# Altium PCB Clock.PcbDoc
Units mm, origin at the board's own origin, x right, y up, seen from the top; angles counter-clockwise.
Board outline 90 x 30 mm, 2 copper layers (Top Layer, Bottom Layer); 17 components, 76 nets, 181 pads, 111 vias.
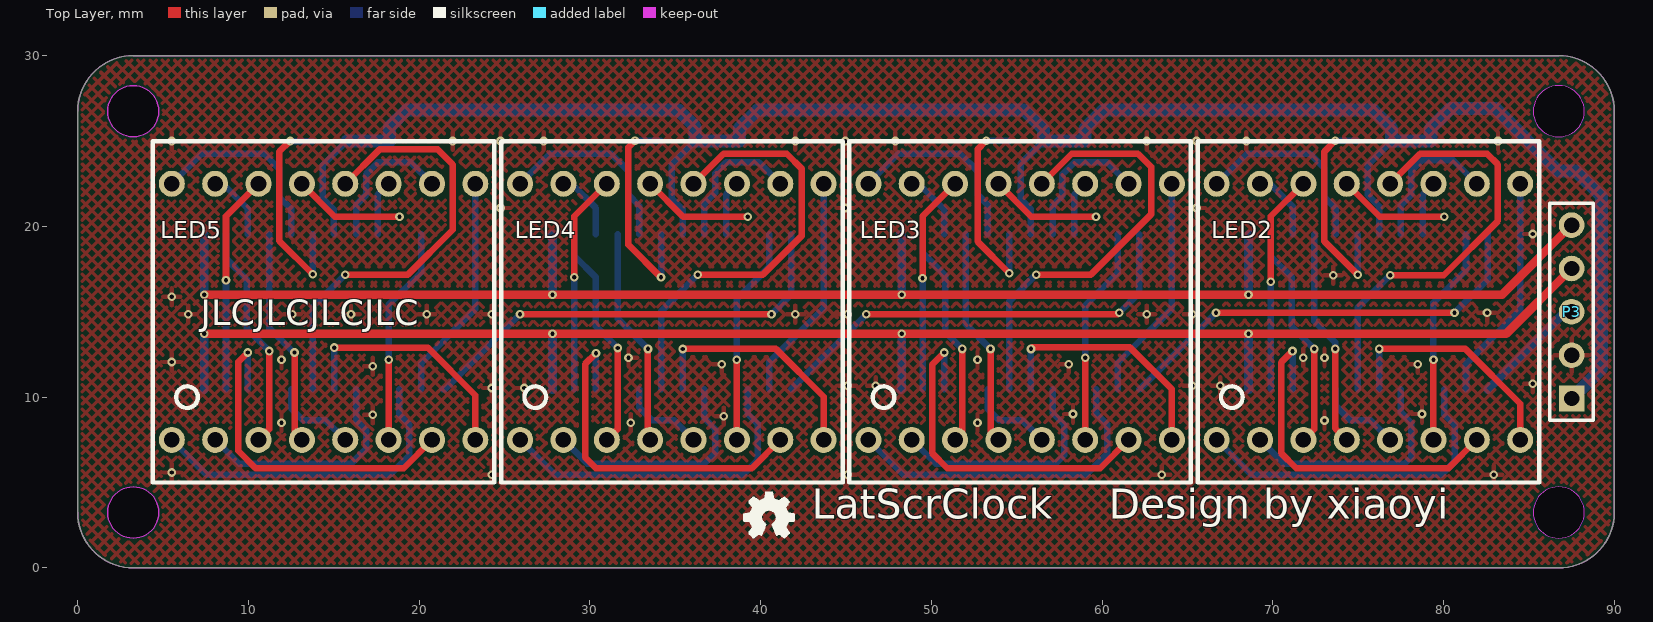
[diagram p0: Top Layer view]
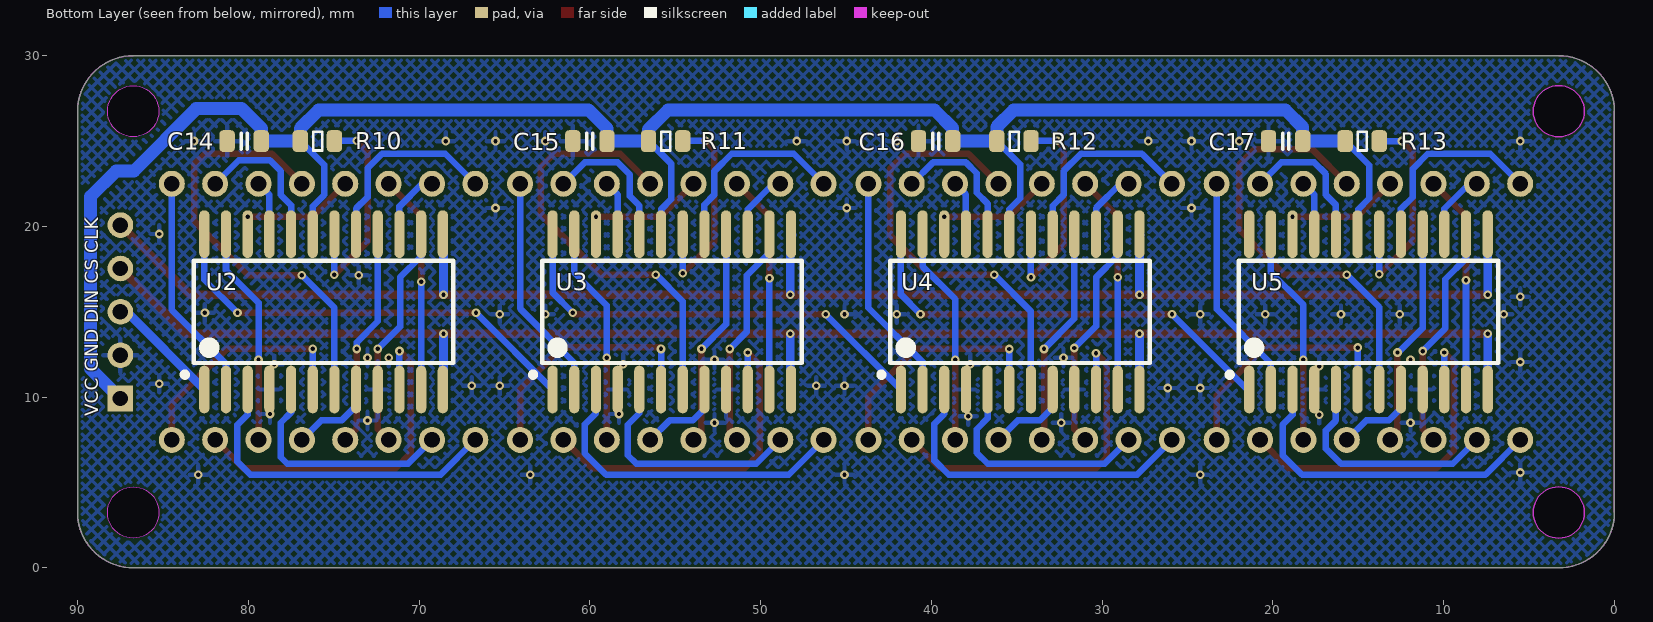
[diagram p1: Bottom Layer view, seen from below]
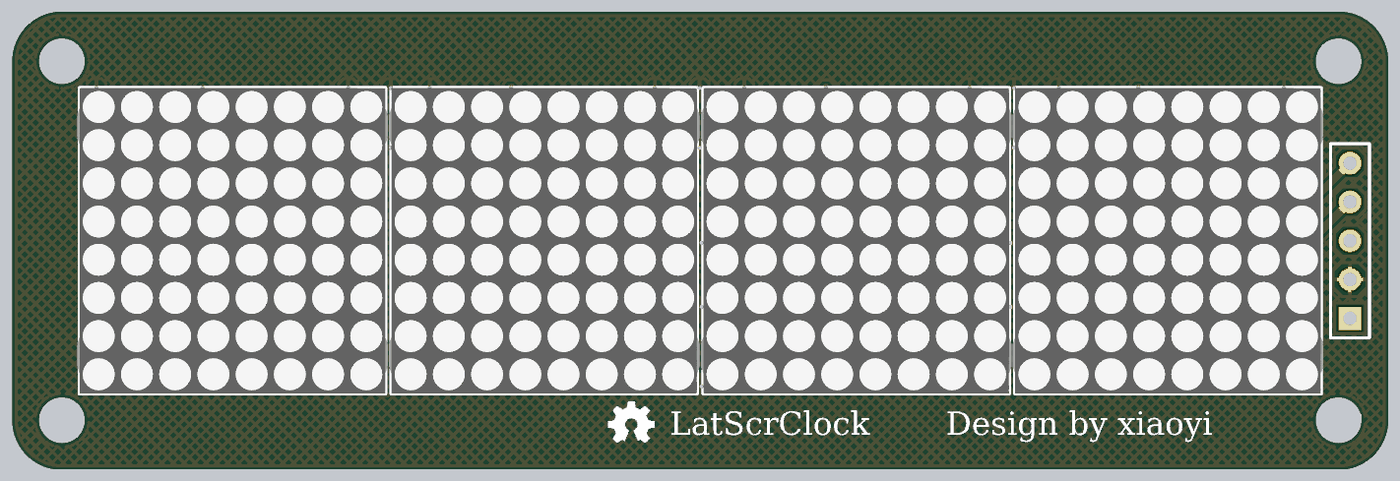
[diagram p2: 3D render of the assembled board from above, using the file's embedded part models]

## Layer stack, top to bottom
Top Solder: solder mask 0.0102, Solder Resist, Dk 3.5
Top Layer: signal copper 0.0356
Dielectric 1: dielectric 0.32, FR-4, Dk 4.8
Bottom Layer: signal copper 0.0356
Bottom Solder: solder mask 0.0102, Solder Resist, Dk 3.5

## Board outline
3.25,0 cw(c3.25,3.25) 0,3.25 0,26.75 cw(c3.25,26.75) 3.25,30 86.75,30 cw(c86.75,26.75) 90,26.75 90,3.25 cw(c86.75,3.25) 86.75,0
cut-out: 3.25,1.75 cw(c3.25,3.25) 1.75,3.25 cw(c3.25,3.25) 3.25,4.75 cw(c3.25,3.25) 4.75,3.25 cw(c3.25,3.25)
cut-out: 3.25,25.25 cw(c3.25,26.75) 1.75,26.75 cw(c3.25,26.75) 3.25,28.25 cw(c3.25,26.75) 4.75,26.75 cw(c3.25,26.75)
cut-out: 85.25,26.75 ccw(c86.75,26.75) 86.75,25.25 ccw(c86.75,26.75) 88.25,26.75 ccw(c86.75,26.75) 86.75,28.25 ccw(c86.75,26.75)
cut-out: 85.25,3.25 ccw(c86.75,3.25) 86.75,1.75 ccw(c86.75,3.25) 88.25,3.25 ccw(c86.75,3.25) 86.75,4.75 ccw(c86.75,3.25)

## Design rules (kind name [scope] priority, off if disabled: settings)
Clearance [All] p1: gap=0.152 ignorepadtopadclearanceinfootprint=FALSE
ComponentClearance [All] p1: gap=0 collisioncheckmode=3 verticalgap=0.254 showdistances=FALSE
PolygonConnect [All] p1: connectstyle=Relief reliefconductorwidth=0.254 reliefentries=4 polygonreliefangle="90 Angle" airgapwidth=0.254
RoutingVias [All] p1: holewidth=0.711 width=1.27 viastyle="Through Hole" minholewidth=0.711 minwidth=1.27 maxholewidth=0.711 maxwidth=1.27
SolderMaskExpansion [All] p1: expansion=0.102
Width [All] p1: maxlimit=0.762 minlimit=0.254 preferedwidth=0.254
29 further rules are at their usual default settings.

## Components (designator, comment, footprint, x,y, rotation, side; value= is the part's Value field where it differs from the comment)
C14 "10uf" C0805 80.25,25 r0 bottom
C15 "10uf" C0805 60,25 r0 bottom
C16 "10uf" C0805 39.75,25 r0 bottom
C17 "10uf" C0805 19.25,25 r0 bottom
LED2 "LatticeScreen" SLD1388DRA1GD_20_withheaders 75.6,15 r0 top
LED3 "LatticeScreen" SLD1388DRA1GD_20_withheaders 55.2,15 r0 top
LED4 "LatticeScreen" SLD1388DRA1GD_20_withheaders 34.8,15 r0 top
LED5 "LatticeScreen" SLD1388DRA1GD_20_withheaders 14.4,15 r0 top
P3 "Header 5" HDR1X5 87.5,9.92 r90 top
R10 "10k" R0805 76.965,25 r180 bottom
R11 "10k" R0805 56.565,25 r180 bottom
R12 "10k" R0805 36.165,25 r180 bottom
R13 "10k" R0805 15.765,25 r180 bottom
U2 "MAX7219CWG" SOP-24_L15.2-W7.8-P1.27-LS10.6-BL 75.6,15 r180 bottom
U3 "MAX7219CWG" SOP-24_L15.2-W7.8-P1.27-LS10.6-BL 55.2,15 r180 bottom
U4 "MAX7219CWG" SOP-24_L15.2-W7.8-P1.27-LS10.6-BL 34.8,15 r180 bottom
U5 "MAX7219CWG" SOP-24_L15.2-W7.8-P1.27-LS10.6-BL 14.4,15 r180 bottom

## Footprints (in the part's own frame and the unit in brackets; to place one, negate y for a bottom-side part, rotate by r counter-clockwise, add the part's x,y. Pads: shape width x height; smd on the part's side, far side on the other; paste and mask are expansions set on the pad)
C0805 [mm] "C0805 瓷片电容"
  rrect50% 0.9x1.27 smd: 1(-1,0) 2(1,0)
  silkscreen extent -0.17,-0.48 0.18,0.48, body extent -1,-0.64 1.03,0.64, height 0.41
HDR1X5 [mm] "Connector; Header; 5 Position"
  rect 1.5x1.5 hole 0.9: 1(0,0)
  round 1.5 hole 0.9: 2(2.54,0) 3(5.08,0) 4(7.62,0) 5(10.16,0)
  silkscreen extent -1.27,-1.27 11.43,1.27
R0805 [mm]
  rrect50% 0.9x1.27 smd: 1(0,0) 2(2,0)
  silkscreen extent 0.75,-0.55 1.28,0.55, body extent 0,-0.64 2.03,0.64, height 0.41
SLD1388DRA1GD_20_withheaders [mil] "点阵屏尺寸20.2*20.2mm3D模型带排针"
  round 60 hole 36: 1(-350,-295.28) 2(-250,-295.28) 3(-150,-295.28) 4(-50,-295.28) 5(50,-295.28) 6(150,-295.28) 7(250,-295.28) 8(350,-295.28) 9(350,295.28) 10(250,295.28) 11(150,295.28) 12(50,295.28) 13(-50,295.28) 14(-150,295.28) 15(-250,295.28) 16(-350,295.28)
  silkscreen extent -394,-394 394,394, body extent -400,-394 400,394, height 394
SOP-24_L15.2-W7.8-P1.27-LS10.6-BL [mm]
  oval 0.6x2.792 smd: 1(-6.985,-4.55) 2(-5.715,-4.55) 3(-4.445,-4.55) 4(-3.175,-4.55) 5(-1.905,-4.55) 6(-0.635,-4.55) 7(0.635,-4.55) 8(1.905,-4.55) 9(3.175,-4.55) 10(4.445,-4.55) 11(5.715,-4.55) 12(6.985,-4.55) 13(6.985,4.55) 14(5.715,4.55) 15(4.445,4.55) 16(3.175,4.55) 17(1.905,4.55) 18(0.635,4.55) 19(-0.635,4.55) 20(-1.905,4.55) 21(-3.175,4.55) 22(-4.445,4.55) 23(-5.715,4.55) 24(-6.985,4.55)
  silkscreen extent -8.28,-3.83 7.6,3, body extent -7.75,-5.15 7.75,5.15, height 2.65

## Part data
C14 C15 C16 C17: library part CAP, "无极电容", accuracy=20%
LED2 LED3 LED4 LED5: "8*8共阴点阵屏", BOM_Manufacturer=SUNLIGHT, BOM_Manufacturer Part=SLD1388DRA1GD, BOM_Supplier=LCSC, BOM_Supplier Part=C225991, Contributor=LCSC, spicePre=L, spiceSymbolName=SLD1388DRA1GD
P3: "Header, 5-Pin", LatestRevisionDate=17-Jul-2002, LatestRevisionNote="Re-released for DXP Platform.", Publisher="Altium Limited"
R10 R11 R12 R13: library part RES, "电阻"
U2 U3 U4 U5: "共阴极显示驱动", BOM_LCSC Assembly=Yes, BOM_Manufacturer=MAXIM, BOM_Manufacturer Part=MAX7219CWG, BOM_Supplier=LCSC, BOM_Supplier Part=C9964, image=//image.lceda.cn/szlcsc/C9964.jpg, SMT Type=Extend, spicePre=U, spiceSymbolName=MAX7219CWG

## Via types
v1: diameter 0.508, hole 0.254, Top Layer to Bottom Layer, tented both sides, 111 vias

## Nets (pads, with @x,y where several pads share a name; then routed paths per layer and width w, separated by ;. In a path a pad name is that pad's centre, name@x,y a point inside that pad or via, vN(x,y) a via of type N, cw(c..) or ccw(c..) an arc to the next point about the centre after c; other vN are vias at no path point)
CLK: P3.5 U2.13 U3.13 U4.13 U5.13 | length 96.2
  Top Layer w0.508: v1(7.415,16.002) v1(27.813,16.002) v1(48.26,16.002) v1(68.58,16.002) 83.422,16.002 P3.5
  Bottom Layer w0.508: U5.13@7.365,19.5 U5.13 v1(7.415,16.002) ; U4.13@27.765,19.5 U4.13@27.813,19.548 ; v1(27.813,16.002) U4.13@27.813,19.548 ; U4.13 U4.13@27.813,19.548 ; U3.13@48.165,19.5 U3.13 48.26,19.505 v1(48.26,16.002) ; U2.13@68.565,19.5 U2.13@68.58,19.515 ; v1(68.58,16.002) U2.13@68.58,19.515 ; U2.13 U2.13@68.58,19.515
CS: P3.4 U2.12 U3.12 U4.12 U5.12 | length 94.8
  Top Layer w0.508: v1(7.415,13.716) v1(27.813,13.716) v1(48.26,13.716) v1(68.58,13.716) 83.676,13.716 P3.4
  Bottom Layer w0.508: U5.12 v1(7.415,13.716) ; v1(27.813,13.716) 27.813,10.452 U4.12 ; U3.12 48.26,10.495 v1(48.26,13.716) ; v1(68.58,13.716) 68.58,10.485 U2.12
DATA: P3.3 U2.1 | length 6.8
  Bottom Layer w0.508: U2.1 87.135,15 P3.3
DIG10: LED2.9 U2.2 | length 13.4
  Bottom Layer w0.381: U2.2 81.315,11.938 84.49,15.113 LED2.9
DIG11: LED2.14 U2.11 | length 12.8
  Top Layer w0.381: v1(69.885,16.764) 69.885,20.595 LED2.14
  Bottom Layer w0.381: U2.11 v1(69.885,16.764)
DIG12: LED2.8 U2.6 | length 14.1
  Top Layer w0.381: v1(76.235,12.827) 81.28,12.827 84.49,9.617 LED2.8
  Bottom Layer w0.381: U2.6 v1(76.235,12.827)
DIG13: LED2.12 U2.7 | length 25.7
  Top Layer w0.381: v1(76.87,17.145) 80.01,17.145 83.185,20.32 83.185,23.622 82.55,24.257 78.627,24.257 LED2.12
  Bottom Layer w0.381: U2.7 74.965,15.24 v1(76.87,17.145)
DIG14: LED2.1 U2.3 | length 19.6
  Bottom Layer w0.381: LED2.1 68.749,5.461 79.883,5.461 80.645,6.223 80.645,8.382 80.045,8.982 U2.3
DIG15: LED2.7 U2.10 | length 21
  Top Layer w0.381: v1(71.155,12.7) 70.485,12.03 70.485,6.731 71.374,5.842 80.292,5.842 LED2.7
  Bottom Layer w0.381: U2.10 v1(71.155,12.7)
DIG16: LED2.2 U2.5 | length 13.8
  Bottom Layer w0.381: LED2.2 70.654,6.096 77.724,6.096 78.105,6.477 78.105,8.509 77.505,9.109 U2.5
DIG17: LED2.5 U2.8 | length 5
  Bottom Layer w0.381: U2.8 73.695,9.49 74.549,8.636 75.734,8.636 LED2.5
DIG20: LED3.9 U3.2 | length 13.4
  Bottom Layer w0.381: U3.2 60.915,12.02 64.09,15.195 LED3.9
DIG21: LED3.14 U3.11 | length 12.8
  Top Layer w0.381: v1(49.485,16.973) 49.485,20.595 LED3.14
  Bottom Layer w0.381: U3.11 v1(49.485,16.973)
DIG22: LED3.8 U3.6 | length 14.6
  Top Layer w0.381: v1(55.835,12.827) 55.924,12.916 61.633,12.916 64.09,10.459 LED3.8
  Bottom Layer w0.381: U3.6 v1(55.835,12.827)
DIG23: LED3.12 U3.7 | length 25.8
  Top Layer w0.381: v1(56.134,17.18) 59.344,17.18 62.865,20.701 62.865,23.495 62.103,24.257 58.227,24.257 LED3.12
  Bottom Layer w0.381: U3.7 54.565,15.611 v1(56.134,17.18)
DIG24: LED3.1 U3.3 | length 19.4
  Bottom Layer w0.381: LED3.1 48.349,5.461 59.055,5.461 60.301,6.707 60.301,8.406 59.645,9.062 U3.3
DIG25: LED3.7 U3.10 | length 20.9
  Top Layer w0.381: v1(50.755,12.618) 50.038,11.901 50.038,6.731 50.927,5.842 59.892,5.842 LED3.7
  Bottom Layer w0.381: U3.10 v1(50.755,12.618)
DIG26: LED3.2 U3.5 | length 13.9
  Bottom Layer w0.381: LED3.2 50.254,6.096 57.277,6.096 57.785,6.604 57.785,8.382 57.105,9.062 U3.5
DIG27: LED3.5 U3.8 | length 5.1
  Bottom Layer w0.381: U3.8 53.295,9.316 53.975,8.636 55.334,8.636 LED3.5
DIG30: LED4.9 U4.2 | length 13.4
  Bottom Layer w0.381: U4.2 40.515,12.067 43.69,15.242 LED4.9
DIG31: LED4.14 U4.11 | length 12.8
  Top Layer w0.381: v1(29.085,17.016) 29.085,20.595 LED4.14
  Bottom Layer w0.381: U4.11 v1(29.085,17.016)
DIG32: LED4.8 U4.6 | length 14.3
  Top Layer w0.381: v1(35.435,12.825) 40.896,12.825 43.69,10.031 LED4.8
  Bottom Layer w0.381: v1@35.433,12.827 v1(35.435,12.825) U4.6
DIG33: LED4.12 U4.7 | length 26
  Top Layer w0.381: LED4.12 37.827,24.257 41.529,24.257 42.418,23.368 42.418,19.466 40.132,17.18 v1(36.322,17.18)
  Bottom Layer w0.381: U4.7 34.165,15.023 v1(36.322,17.18)
DIG34: LED4.1 U4.3 | length 19.5
  Bottom Layer w0.381: LED4.1 27.949,5.461 38.989,5.461 39.819,6.291 39.819,8.441 39.245,9.015 U4.3
DIG35: LED4.7 U4.10 | length 20.9
  Top Layer w0.381: v1(30.355,12.575) 29.718,11.938 29.718,6.477 30.353,5.842 39.492,5.842 LED4.7
  Bottom Layer w0.381: U4.10 v1(30.355,12.575)
DIG36: LED4.2 U4.5 | length 13.7
  Bottom Layer w0.381: LED4.2 29.854,6.096 36.703,6.096 37.338,6.731 37.338,8.128 36.705,8.761 U4.5
DIG37: LED4.5 U4.8 | length 5
  Bottom Layer w0.381: U4.8 32.895,9.398 33.657,8.636 34.934,8.636 LED4.5
DIG40: LED5.9 U5.2 | length 13.4
  Bottom Layer w0.381: U5.2 20.115,11.987 23.29,15.162 LED5.9
DIG41: LED5.14 U5.11 | length 12.8
  Top Layer w0.381: v1(8.685,16.842) 8.685,20.595 LED5.14
  Bottom Layer w0.381: U5.11 v1(8.685,16.842)
DIG42: LED5.8 U5.6 | length 14.5
  Top Layer w0.381: v1(15.035,12.905) 20.496,12.905 23.29,10.111 LED5.8
  Bottom Layer w0.381: U5.6 v1(15.035,12.905)
DIG43: LED5.12 U5.7 | length 26.2
  Top Layer w0.381: v1(15.67,17.18) 19.339,17.18 21.971,19.812 21.971,23.622 21.082,24.511 17.681,24.511 LED5.12
  Bottom Layer w0.381: U5.7 13.765,15.275 v1(15.67,17.18)
DIG44: LED5.1 U5.3 | length 19.3
  Bottom Layer w0.381: LED5.1 7.549,5.461 18.288,5.461 19.431,6.604 19.431,8.382 18.845,8.968 U5.3
DIG45: LED5.7 U5.10 | length 20.6
  Top Layer w0.381: v1(9.955,12.618) 9.398,12.061 9.398,6.858 10.414,5.842 19.092,5.842 LED5.7
  Bottom Layer w0.381: U5.10 v1(9.955,12.618)
DIG46: LED5.2 U5.5 | length 13.5
  Bottom Layer w0.381: LED5.2 9.454,6.096 16.002,6.096 16.891,6.985 16.891,8.05 16.305,8.636 U5.5
DIG47: LED5.5 U5.8 | length 5
  Bottom Layer w0.381: U5.8 12.495,9.349 13.208,8.636 14.534,8.636 LED5.5
GND: C14.2 C15.2 C16.2 C17.2 P3.2 U2.4 U2.9 U3.4 U3.9 U4.4 U4.9 U5.4 U5.9
  other v1: 24.257,5.461 45.085,5.461 63.5,5.461 82.931,5.461 5.51,5.588 11.938,8.509 32.385,8.509 52.705,8.509 73.025,8.636 37.846,8.89 17.272,8.968 58.293,9.017 78.74,9.017 24.257,10.541 26.162,10.541 45.085,10.668 46.736,10.668 65.278,10.668 66.929,10.668 85.217,10.795 17.272,11.811 37.719,11.938 58.039,11.938 78.486,11.938 5.51,12.061 11.938,12.192 52.705,12.192 32.258,12.319 71.79,12.319 73.025,12.319 6.477,14.859 12.573,14.859 16.002,14.859 20.447,14.859 24.257,14.859 42.037,14.859 45.085,14.859 62.611,14.859 65.278,14.859 82.55,14.94 5.51,15.875 73.533,17.145 85.217,19.558 24.765,21.082 44.958,21.082 65.532,21.082 5.51,25 21.971,25 24.765,25 27.305,25 42.037,25 44.958,25 47.879,25 62.611,25 65.532,25 68.453,25 83.185,25
NetR10_2: R10.2 U2.18 | length 12.6
  Top Layer w0.381: v1(73.66,25.019) 73.025,24.384 73.025,19.12 v1(74.965,17.18)
  Bottom Layer w0.381: v1(73.66,25.019) 74.946,25.019 R10.2 ; v1(74.965,17.18) U2.18
NetR11_2: R11.2 U3.18 | length 12.4
  Top Layer w0.381: v1(53.213,25.019) 52.705,24.511 52.705,19.122 v1(54.565,17.262)
  Bottom Layer w0.381: v1(53.213,25.019) 54.546,25.019 R11.2 ; v1(54.565,17.262) U3.18
NetR12_2: R12.2 U4.18 | length 13
  Top Layer w0.381: v1(32.639,25.019) 32.258,24.638 32.258,18.923 v1(34.165,17.016)
  Bottom Layer w0.381: v1(32.639,25.019) 34.146,25.019 R12.2 ; v1(34.165,17.016) U4.18
NetR13_2: R13.2 U5.18 | length 12.6
  Top Layer w0.381: v1(12.446,25) 12.427,25 11.811,24.384 11.811,19.148 v1(13.765,17.194)
  Bottom Layer w0.381: v1(12.446,25) R13.2 ; v1(13.765,17.194) U5.18
NetU2_24: U2.24 U3.1 | length 25.7
  Top Layer w0.381: v1(66.675,14.94) v1(80.645,14.94)
  Bottom Layer w0.381: U3.1 v1(66.675,14.94) ; v1(80.645,14.94) 82.585,16.88 U2.24
NetU3_24: U3.24 U4.1 | length 26.2
  Top Layer w0.381: v1(46.194,14.859) 60.919,14.859 v1(61,14.94)
  Bottom Layer w0.381: U4.1 v1(46.194,14.859) ; v1(61,14.94) 62.185,16.125 U3.24
NetU4_24: U4.24 U5.1 | length 26.2
  Top Layer w0.381: v1(25.91,14.859) v1(40.632,14.859)
  Bottom Layer w0.381: U5.1 21.501,10.45 v1(25.91,14.859) ; v1(40.632,14.859) 41.785,16.012 U4.24
SEG1A: LED2.3 U2.14 | length 13.4
  Top Layer w0.381: LED2.3 72.425,8.135 v1(72.425,12.827)
  Bottom Layer w0.381: U2.14 69.885,18.253 71.12,17.018 71.12,14.132 v1(72.425,12.827)
SEG1B: LED2.4 U2.16 | length 12.8
  Top Layer w0.381: v1(73.66,12.827) 73.66,8.17 LED2.4
  Bottom Layer w0.381: U2.16 72.425,14.443 73.66,13.208 v1(73.66,12.827)
SEG1C: LED2.10 U2.20 | length 8.6
  Bottom Layer w0.381: U2.20 77.505,21.244 78.105,21.844 78.105,23.241 78.74,23.876 80.574,23.876 LED2.10
SEG1D: LED2.6 U2.23 | length 12.8
  Top Layer w0.381: LED2.6 v1(79.41,12.192)
  Bottom Layer w0.381: v1(79.41,12.192) 79.41,15.529 81.315,17.434 U2.23
SEG1DP: LED2.13 U2.22 | length 6.5
  Top Layer w0.381: LED2.13 76.256,20.574 v1(80.045,20.574)
SEG1E: LED2.11 U2.21 | length 3.2
  Bottom Layer w0.381: U2.21 78.775,21.865 LED2.11
SEG1F: LED2.15 U2.15 | length 4.1
  Bottom Layer w0.381: LED2.15 69.829,22.5 71.155,21.174 U2.15
SEG1G: LED2.16 U2.17 | length 11.5
  Bottom Layer w0.381: LED2.16 68.467,24.257 72.171,24.257 73.025,23.403 73.025,21.717 73.695,21.047 U2.17
SEG2A: LED3.3 U3.14 | length 13.2
  Top Layer w0.381: LED3.3 51.816,7.926 v1(51.816,12.827)
  Bottom Layer w0.381: U3.14 49.485,18.46 50.8,17.145 50.8,13.843 v1(51.816,12.827)
SEG2B: LED3.4 U3.16 | length 12.8
  Top Layer w0.381: v1(53.467,12.827) 53.467,7.963 LED3.4
  Bottom Layer w0.381: U3.16 52.025,14.269 v1(53.467,12.827)
SEG2C: LED3.10 U3.20 | length 8.4
  Bottom Layer w0.381: U3.20 57.105,21.223 57.658,21.776 57.658,23.032 58.375,23.749 60.301,23.749 LED3.10
SEG2D: LED3.6 U3.23 | length 12.8
  Top Layer w0.381: LED3.6 v1(59.01,12.319)
  Bottom Layer w0.381: v1(59.01,12.319) 59.01,15.377 60.915,17.282 U3.23
SEG2DP: LED3.13 U3.22 | length 6.5
  Top Layer w0.381: LED3.13 55.856,20.574 v1(59.645,20.574)
SEG2E: LED3.11 U3.21 | length 3.2
  Bottom Layer w0.381: U3.21 58.375,21.865 LED3.11
SEG2F: LED3.15 U3.15 | length 4
  Bottom Layer w0.381: LED3.15 49.255,22.5 50.755,21 U3.15
SEG2G: LED3.16 U3.17 | length 11.5
  Bottom Layer w0.381: LED3.16 48.067,24.257 51.689,24.257 52.705,23.241 52.705,21.865 53.295,21.275 U3.17
SEG3A: LED4.3 U4.14 | length 13.4
  Top Layer w0.381: LED4.3 31.625,8.135 v1(31.625,12.881)
  Bottom Layer w0.381: U4.14 29.085,18.286 30.355,17.016 30.355,14.151 v1(31.625,12.881)
SEG3B: LED4.4 U4.16 | length 12.8
  Top Layer w0.381: v1(33.401,12.827) 33.401,7.629 LED4.4
  Bottom Layer w0.381: U4.16 31.625,14.603 v1(33.401,12.827)
SEG3C: LED4.10 U4.20 | length 8.4
  Bottom Layer w0.381: U4.20 36.705,21.338 37.338,21.971 37.338,23.114 37.973,23.749 39.901,23.749 LED4.10
SEG3D: LED4.6 U4.23 | length 12.8
  Top Layer w0.381: v1(38.608,12.192) 38.608,7.502 LED4.6
  Bottom Layer w0.381: v1(38.608,12.192) 38.608,15.748 40.515,17.655 U4.23
SEG3DP: LED4.13 U4.22 | length 6.5
  Top Layer w0.381: LED4.13 35.456,20.574 v1(39.243,20.574)
SEG3E: LED4.11 U4.21 | length 3.2
  Bottom Layer w0.381: U4.21 37.975,21.865 LED4.11
SEG3F: LED4.15 U4.15 | length 4
  Bottom Layer w0.381: LED4.15 28.935,22.5 30.355,21.08 U4.15
SEG3G: LED4.16 U4.17 | length 11.5
  Bottom Layer w0.381: LED4.16 27.667,24.257 31.242,24.257 32.258,23.241 32.258,21.844 32.895,21.207 U4.17
SEG4A: LED5.3 U5.14 | length 13.1
  Top Layer w0.381: LED5.3 11.225,8.135 v1(11.225,12.7)
  Bottom Layer w0.381: U5.14 8.685,18.126 9.906,16.905 9.906,14.024 v1@11.049,12.881
SEG4B: LED5.4 U5.16 | length 12.9
  Top Layer w0.381: v1(12.7,12.618) 12.7,7.93 LED5.4
  Bottom Layer w0.381: U5.16 11.225,14.048 12.655,12.618 v1(12.7,12.618)
SEG4C: LED5.10 U5.20 | length 8.4
  Bottom Layer w0.381: U5.20 16.305,21.258 16.891,21.844 16.891,23.065 17.575,23.749 19.501,23.749 LED5.10
SEG4D: LED5.6 U5.23 | length 12.8
  Top Layer w0.381: LED5.6 v1(18.21,12.192)
  Bottom Layer w0.381: v1(18.21,12.192) 18.21,15.416 20.115,17.321 U5.23
SEG4DP: LED5.13 U5.22 | length 6.5
  Top Layer w0.381: LED5.13 15.056,20.574 v1(18.845,20.574)
SEG4E: LED5.11 U5.21 | length 3.2
  Bottom Layer w0.381: U5.21 17.575,21.865 LED5.11
SEG4F: LED5.15 U5.15 | length 4
  Bottom Layer w0.381: LED5.15 8.488,22.5 9.955,21.033 U5.15
SEG4G: LED5.16 U5.17 | length 11.5
  Bottom Layer w0.381: LED5.16 7.267,24.257 10.922,24.257 11.811,23.368 11.811,21.717 12.495,21.033 U5.17
VCC: C14.1 C15.1 C16.1 C17.1 P3.1 R10.1 R11.1 R12.1 R13.1 U2.19 U3.19 U4.19 U5.19 | length 121.8
  Bottom Layer w0.381: U5.19 15,19.585 15,21 14.351,21.649 14.351,23.586 R13.1 ; U4.19 35.435,21.012 34.798,21.649 34.798,23.633 R12.1 ; U3.19 55.835,21 55.245,21.59 55.245,23.68 R11.1 ; U2.19 76.235,21.174 75.565,21.844 75.565,23.6 R10.1
  Bottom Layer w0.762: R13.1 C17.1 18.25,25.812 19.261,26.824 35.176,26.824 36.165,25.835 R12.1 C16.1 38.75,25.755 39.819,26.824 55.426,26.824 56.565,25.685 R11.1 C15.1 59,25.75 60.074,26.824 75.883,26.824 76.965,25.742 R10.1 C14.1 79.25,25.75 80.398,26.898 83.06,26.898 86.707,23.25 87.75,23.25 89.25,21.75 89.25,11.67 P3.1
pads on no net: U5.24

## Polygon pours and split planes (outlines as drawn)
GND on Top Layer "Top Layer-GND" (hatched 45Degree grid 0.508 track 0.203, remove dead copper, pour order 2): -2,32 92,32 92,-2 -2,-2
GND on Bottom Layer "Bottom Layer-GND" (hatched 45Degree grid 0.508 track 0.203, remove dead copper, pour order 0): -2,32 -2,-2 92,-2 92,32

## Keep-outs
Keep-Out Layer:
  lines w0.013: 0,3.25 ccw(c3.25,3.25) 3.25,0 86.75,0 ccw(c86.75,3.25) 90,3.25 90,26.75 ccw(c86.75,26.75) 86.75,30 3.25,30 ccw(c3.25,26.75) 0,26.75 0,3.25 ; 1.75,3.25 cw(c3.25,3.25) 3.25,4.75 cw(c3.25,3.25) 4.75,3.25 cw(c3.25,3.25) 3.25,1.75 cw(c3.25,3.25) 1.75,3.25 ; 1.75,26.75 cw(c3.25,26.75) 3.25,28.25 cw(c3.25,26.75) 4.75,26.75 cw(c3.25,26.75) 3.25,25.25 cw(c3.25,26.75) 1.75,26.75 ; 85.25,3.25 cw(c86.75,3.25) 86.75,4.75 cw(c86.75,3.25) 88.25,3.25 cw(c86.75,3.25) 86.75,1.75 cw(c86.75,3.25) 85.25,3.25 ; 85.25,26.75 cw(c86.75,26.75) 86.75,28.25 cw(c86.75,26.75) 88.25,26.75 cw(c86.75,26.75) 86.75,25.25 cw(c86.75,26.75) 85.25,26.75

## Silkscreen, mask and mechanical layers (free items; w line width, h text height)
Top Overlay:
  drawing of 195 lines, arcs and shapes, not listed
  text "JLCJLCJLCJLC" at 7.2,14.2 h1.5
  text "LatScrClock" at 43,2.294 h3
  text "Design by xiaoyi" at 60.4,2.294 h3
Bottom Overlay:
  text "VCC GND DIN CS CLK" at 88.8,8.89 h0.8 r270
Mechanical 1:
  circle w0.127: c86.75,3.25 r1.5
  circle w0.127: c86.75,26.75 r1.5
  circle w0.127: c3.25,26.75 r1.5
  circle w0.127: c3.25,3.25 r1.5
  lines w0.127: 0,3.25 ccw(c3.25,3.25) 3.25,0 86.75,0 ccw(c86.75,3.25) 90,3.25 90,26.75 ccw(c86.75,26.75) 86.75,30 3.25,30 ccw(c3.25,26.75) 0,26.75 0,3.25